# Altium PCB BMQ.PcbDoc
Units mm, origin at the board's own origin, x right, y up, seen from the top; angles counter-clockwise.
Board outline 152.4 x 101.6 mm, 2 copper layers (Top Layer, Bottom Layer); 8 components, 7 nets, 36 pads, 7 vias.
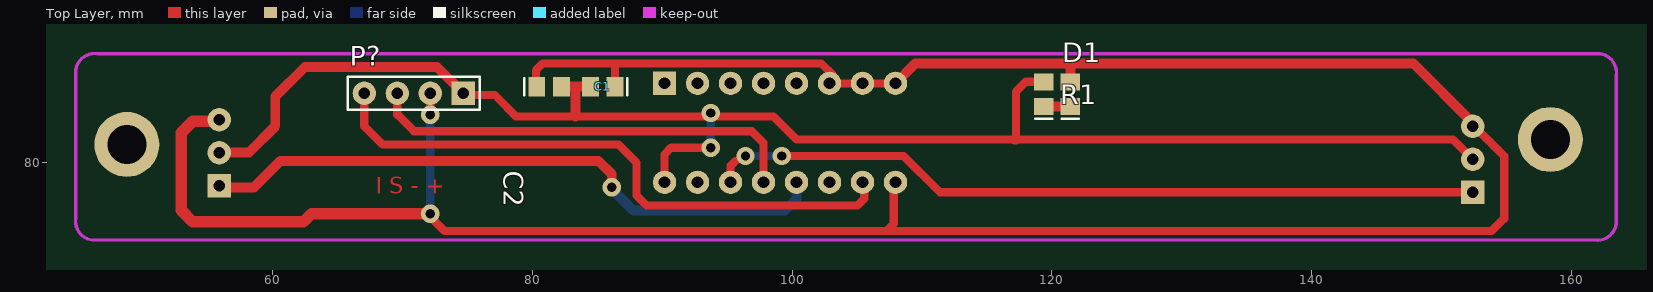
[diagram p0: Top Layer view]
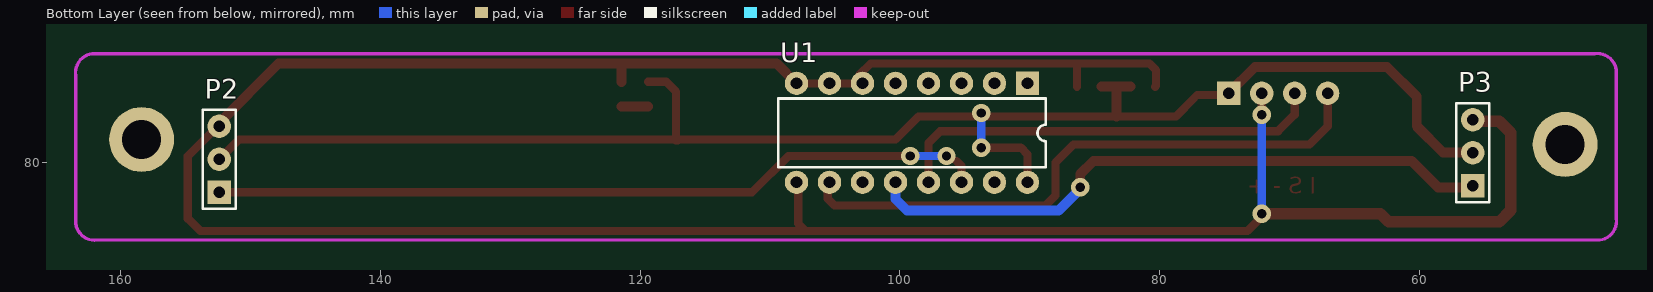
[diagram p1: Bottom Layer view, seen from below]

## Layer stack, top to bottom
Top Layer: signal copper 0.0356
Dielectric: dielectric 0.32, FR-4, Dk 4.8
Bottom Layer: signal copper 0.0356

## Board outline
25.4,25.4 177.8,25.4 177.8,127 25.4,127

## Design rules (kind name [scope] priority, off if disabled: settings)
Clearance [All] p1: gap=0.254
ComponentClearance [All] p1: gap=0.254 collisioncheckmode=3 verticalgap=0.254
PolygonConnect [All] p1: connectstyle=Relief reliefconductorwidth=0.254 reliefentries=4 polygonreliefangle="90 Angle"
RoutingVias [All] p1: holewidth=0.711 width=1.27 viastyle="Through Hole" minholewidth=0.711 minwidth=1.27 maxholewidth=0.711 maxwidth=1.27
SolderMaskExpansion [All] p1: expansion=0.102
TestPointUsage [All] p1: valid=0 allowmultiple=FALSE
Testpoint [All] p1: side=15 testpointundercomponent=TRUE minsize=1.016 maxsize=2.54 preferedsize=1.524 minholesize=0 maxholesize=1.016 preferedholesize=0.813 testpointgrid=0.025 style=1023 order=0-112345678
Width [All] p1: maxlimit=2.54 minlimit=0.254 preferedwidth=1.524
18 further rules are at their usual default settings.

## Components (designator, comment, footprint, x,y, rotation, side; value= is the part's Value field where it differs from the comment)
C1 "Cap" C0805 85.41,85.852 r180 top
C2 "Cap" C0805 81.28,85.852 r0 top
D1 "LED0" C0805 121.412,85.278 r90 top
P2 "Header 3" HDR1X3 152.4,77.724 r90 bottom
P3 "Header 3" HDR1X3 55.88,78.232 r90 bottom
P? "Header 4" HDR1X4 74.676,85.344 r180 top
R1 "Res2" C0805 119.38,85.278 r90 top
U1 "CD4052" DIP-16 99.06,82.296 r0 bottom

## Footprints (in the part's own frame and the unit in brackets; to place one, negate y for a bottom-side part, rotate by r counter-clockwise, add the part's x,y. Pads: shape width x height; smd on the part's side, far side on the other; paste and mask are expansions set on the pad)
C0805 [mm] "Chip Capacitor; Body 2.0 x 1.2 mm (LxW typ)"
  rect 1.3x1.5 smd: 1(-0.95,0) 2(0.95,0)
  silkscreen extent -1.9,-0.65 -1.9,0.65
DIP-16 [mm] "DIP; 16 Leads; Row Spacing 7.62 mm; Pitch 2.54 mm"
  rect 1.8x1.8 hole 0.9: 1(-8.89,-3.81)
  round 1.8 hole 0.9: 2(-6.35,-3.81) 3(-3.81,-3.81) 4(-1.27,-3.81) 5(1.27,-3.81) 6(3.81,-3.81) 7(6.35,-3.81) 8(8.89,-3.81) 9(8.89,3.81) 10(6.35,3.81) 11(3.81,3.81) 12(1.27,3.81) 13(-1.27,3.81) 14(-3.81,3.81) 15(-6.35,3.81) 16(-8.89,3.81)
  silkscreen extent -10.3,-2.65 10.3,2.65
HDR1X3 [mm] "Connector; Header; 3 Position"
  rect 1.8x1.8 hole 0.9: 1(0,0)
  round 1.8 hole 0.9: 2(2.54,0) 3(5.08,0)
  silkscreen extent -1.27,-1.27 6.35,1.27
HDR1X4 [mm] "Connector; Header; 4 Position"
  rect 1.8x1.8 hole 0.9: 1(0,0)
  round 1.8 hole 0.9: 2(2.54,0) 3(5.08,0) 4(7.62,0)
  silkscreen extent -1.27,-1.27 8.89,1.27

## Part data
C1 C2: "Capacitor"
D1: "Typical INFRARED GaAs LED"
P2 P3: "Header, 3-Pin"
P?: "Header, 4-Pin"
R1: "Resistor"
U1: library part Component_1

## Free pads (board coordinates)
  round 5 hole 3: 0(48.768,81.407) 1(158.369,81.788)

## Via types
v1: diameter 1.4, hole 0.711, Top Layer to Bottom Layer, 7 vias

## Nets (pads, with @x,y where several pads share a name; then routed paths per layer and width w, separated by ;. In a path a pad name is that pad's centre, name@x,y a point inside that pad or via, vN(x,y) a via of type N, cw(c..) or ccw(c..) an arc to the next point about the centre after c; other vN are vias at no path point)
GND: C1.1 C2.1 D1.2 P2.3 P3.3 P?.2 U1.6 U1.7 U1.8 U1.9 | length 215.5
  Top Layer w0.635: v1(72.136,76.073) 72.136,75.819 73.218,74.737 107.249,74.737 ; v1@72.136,83.439 v1(72.136,83.693) P?.2 ; C2.1 80.264,85.918 80.264,87.122 80.772,87.63 86.36,87.63 ; C1.1 86.36,87.63 ; U1.6 U1.6@103.124,86.106 ; U1.9 107.823,78.359 107.823,75.311 107.249,74.737 ; U1.8@108.077,86.233 U1.8 U1.7 U1.6@103.124,86.106 ; P2.3@152.4,82.931 152.463,82.867 154.813,80.518 154.813,75.692 153.858,74.737 107.249,74.737 ; 86.36,87.63 102.235,87.63 103.124,86.741 U1.6@103.124,86.106
  Top Layer w0.762: U1.9 U1.9@108.077,78.486 ; U1.8 109.474,87.63 121.412,87.63 ; D1.2 121.412,87.63 ; P2.3 152.4,82.931 152.4,83.058 147.828,87.63 121.412,87.63
  Top Layer w0.889: P3.3 55.753,83.185 53.848,83.185 52.959,82.296 52.959,76.327 53.848,75.438 62.357,75.438 62.992,76.073 v1(72.136,76.073)
  Bottom Layer w0.635: v1@72.136,76.454 v1(72.136,83.693)
L: P2.1 U1.14 | length 58.9
  Top Layer w0.635: U1.14@95.377,78.613 U1.14 95.25,79.756 95.631,80.137 ; v1@99.441,80.518 108.585,80.518 111.379,77.724 P2.1
  Bottom Layer w0.635: v1(96.393,80.518) v1(99.187,80.518)
NetD1_1: D1.1 R1.1 | length 2
  Top Layer w0.762: R1.1 D1.1
PAX: P?.4 U1.10 | length 47.1
  Top Layer w0.635: P?.4@67.056,85.852 P?.4 67.056,82.804 68.453,81.407 86.614,81.407 88.011,80.01 88.011,77.47 88.773,76.708 105.029,76.708 105.537,77.216 105.537,78.359 U1.10
PT7: P?.3 U1.13 | length 34.4
  Top Layer w0.635: P?.3@69.596,85.852 P?.3 69.596,83.693 70.866,82.423 96.901,82.423 ; 96.984,82.34 97.79,81.534 U1.13 U1.13@97.79,78.232
R: P3.1 U1.12 | length 48.9
  Top Layer w0.762: P3.1@56.134,78.105 58.547,78.105 60.579,80.137 85.09,80.137 86.106,79.121 v1(86.106,78.105)
  Bottom Layer w0.762: v1(86.106,78.105) 86.106,77.978 87.757,76.327 99.441,76.327 100.33,77.216 U1.12
VCC: C1.2 C2.2 P2.2 P3.2 P?.1 R1.2 U1.16 | length 122.3
  Top Layer w0.635: P?.1@74.549,85.217 74.676,85.217 77.089,85.217 ; 77.343,84.963 78.74,83.566 83.312,83.566 93.726,83.566 98.552,83.566 100.33,81.788 117.094,81.788 ; U1.16 90.17,80.645 90.678,81.153 v1(93.726,81.153) ; R1.2 117.978,86.228 117.221,85.471 117.221,81.788 150.876,81.788 P2.2
  Top Layer w0.762: P3.2@56.134,80.772 58.166,80.772 60.198,82.804 60.198,85.09 62.484,87.376 72.644,87.376 P?.1 ; C2.2 83.312,85.852 ; 83.312,83.566 83.312,85.852 ; C1.2 83.312,85.852 ; 117.094,81.788 117.221,81.788
  Bottom Layer w0.635: v1(93.726,81.153) v1(93.726,83.82)
pads on no net: U1.1 U1.2 U1.3 U1.4 U1.5 U1.11 U1.15

## Keep-outs
Keep-Out Layer:
  lines w0.25: 44.831,75.692 44.831,77.216 44.831,77.597 44.831,79.375 44.831,86.36 44.831,87.122 ; 46.101,74.041 46.736,74.041 82.55,74.041 162.052,74.041 ; 46.482,88.392 162.179,88.392 ; 163.449,75.311 163.449,76.835 163.449,86.233 163.449,86.741
  lines w0.254: 44.831,75.692 ccw(c46.291,75.501) 46.101,74.041 ; 44.831,87.122 cw(c46.292,86.931) 46.482,88.392 ; 161.798,74.041 ccw(c161.988,75.501) 163.449,75.311 ; 162.179,88.392 cw(c161.988,86.931) 163.449,86.741

## Other copper
Top Layer:
  text "I S - +" at 67.945,77.597 h1.27

## Dimensions
44.958,87.757 to 163.195,87.503 on Top Overlay